# EAGLE board FieldsMJPanel (EAGLE 9.6.2)
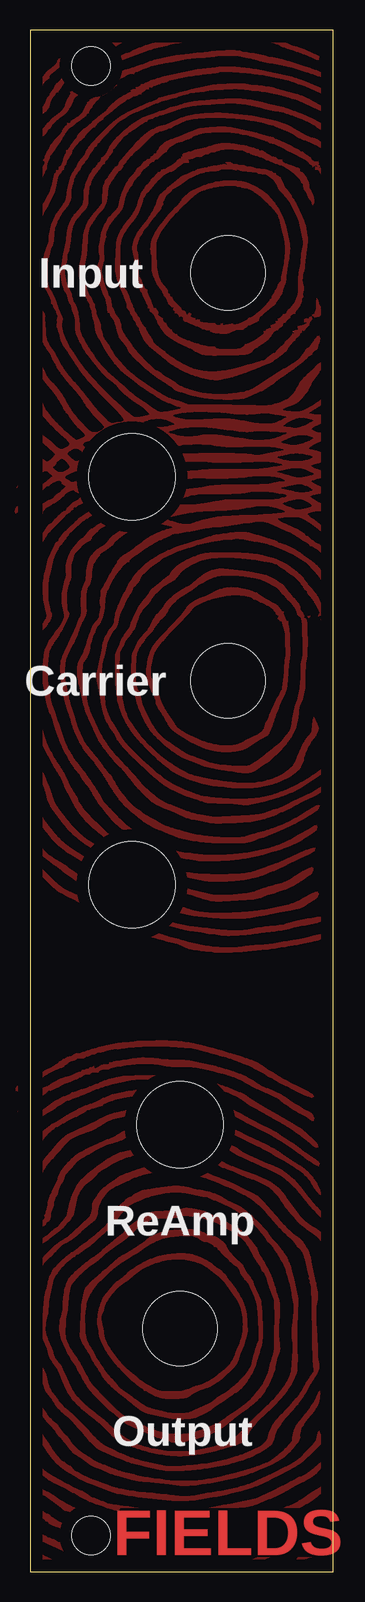
[diagram p0: board, top side]
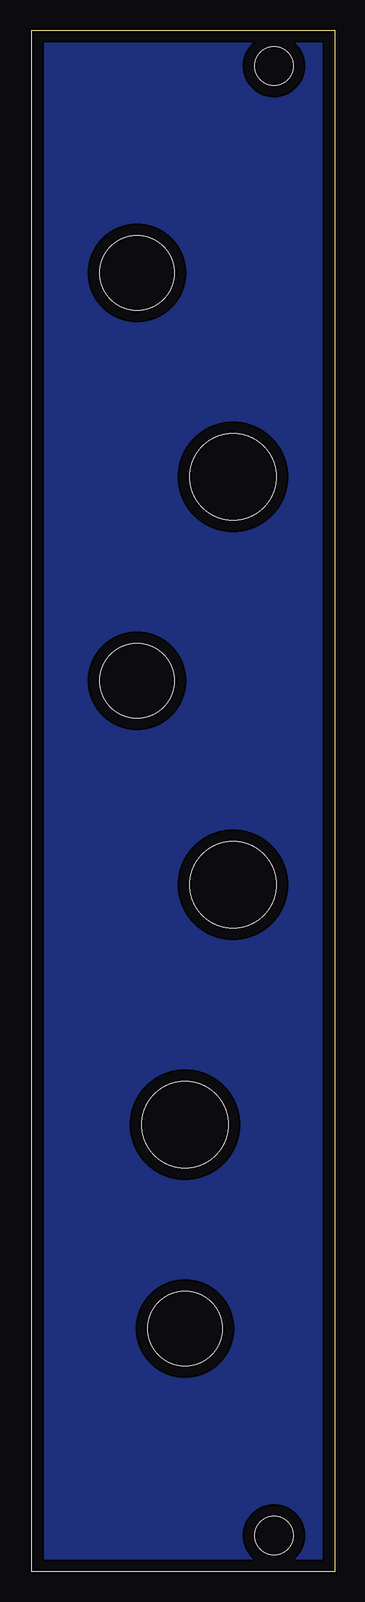
[diagram p1: board, bottom side, seen from below]

Size 25.25 x 128.5 mm. Coordinates in mm from the lower left corner, seen from the top.
Outline: 0,0 25.25,0 25.25,128.5 0,128.5 0,0
Copper layers (1*16): Top 0.035mm / dielectric 1.5mm / Bottom 0.035mm
Design rules "default": minimum track width 6mil, minimum drill 0.35mm, track to track 6mil, track to pad 6mil, pad to pad 6mil, via to via 6mil, smd to smd 6mil, copper to edge 40mil, drill to drill 6mil, minimum pad ring 10mil, minimum via ring 8mil, stop-mask expansion 4mil, vias tented up to drill 0mil, thermal gap 10mil
Holes 3.2 mm at 5.08,3 5.08,125.5
Holes 6.2 mm at 16.5,108.25 16.5,74.25 12.5,20.25

## Footprints (pad centres in the part's own frame; a part is rotated, then mirrored left to right if it is on the bottom)
ALPHA9MM_POT_CUTOUT = hole 7.2: 0,0

## Placement (x,y rotation side)
E$4  [ALPHA9MM_POT_CUTOUT]  8.5,91.25 0 top
E$5  [ALPHA9MM_POT_CUTOUT]  8.5,57.25 0 top
E$6  [ALPHA9MM_POT_CUTOUT]  12.5,37.25 0 top

## Library data of the parts
E$4-E$6 = ElectricNoodleBox

## Tracks (layer width: path | path; a pad name or v marks a point on that pad's centre or on a via)
AGND
  pour Bottom: 0,-0.25 25.5,-0.25 25.5,128.75 0,128.75
GND
  pour Top (rank 3): 1.94,0.46 2.12,0.37 2.31,0.32 2.51,0.3 2.69,0.36 2.6,0.51 2.43,0.62 2.26,0.71 2.08,0.81 1.91,0.92 1.73,1.01 1.38,1.19 1.2,1.28 1.03,1.38 0.85,1.49 0.69,1.6 0.55,1.5 0.51,1.31 0.64,1.16 0.82,1.06 0.99,0.96 1.17,0.88 1.35,0.79 1.53,0.69 1.7,0.59 1.87,0.49
  pour Top (rank 3): 5.63,0.67 5.83,0.68 6.03,0.71 6.22,0.75 6.41,0.8 6.6,0.88 6.43,0.96 6.24,1 6.04,1.03 5.84,1.07 5.65,1.11 5.46,1.16 5.26,1.21 5.07,1.27 4.88,1.33 4.69,1.39 4.5,1.46 4.31,1.52 4.12,1.6 3.94,1.68 3.59,1.87 3.41,1.96 3.24,2.05 3.06,2.14 2.87,2.22 2.69,2.3 2.51,2.38 2.32,2.44 2.17,2.56 2,2.64 1.81,2.71 1.63,2.78 1.43,2.82 1.31,2.96 1.12,3.01 0.93,3.1 0.8,3.21 0.61,3.16 0.48,3.02 0.57,2.84 0.73,2.72 0.9,2.62 1.08,2.53 1.26,2.45 1.44,2.36 1.99,2.12 2.17,2.03 2.35,1.95 2.53,1.86 2.71,1.77 2.88,1.67 3.06,1.57 3.24,1.48 3.42,1.41 3.61,1.34 3.79,1.25 3.96,1.15 4.14,1.13 4.34,1.07 4.53,1.01 5.1,0.82 5.29,0.77 5.48,0.71
  pour Top (rank 3): 18.34,0.77 18.54,0.78 18.74,0.81 18.94,0.85 19.13,0.89 19.32,0.95 19.51,1.02 19.7,1.09 19.88,1.18 20.06,1.25 20.25,1.33 20.44,1.4 20.82,1.52 21,1.59 21.19,1.66 21.37,1.75 21.55,1.83 21.74,1.91 21.92,1.98 22.29,2.13 22.86,2.34 23.23,2.49 23.6,2.63 23.78,2.71 23.97,2.78 24.16,2.85 24.35,2.92 24.5,3.05 24.55,3.24 24.45,3.36 24.27,3.29 23.9,3.12 23.54,2.96 22.98,2.73 22.43,2.5 21.87,2.28 21.31,2.06 20.75,1.85 20.37,1.71 20,1.59 19.81,1.52 19.62,1.44 19.44,1.35 19.29,1.3 19.1,1.23 18.74,1.06 18.55,0.99 18.36,0.94
  pour Top (rank 3): 22.31,0.98 22.51,0.95 22.71,0.98 22.89,1.04 23.08,1.12 23.27,1.18 23.46,1.23 23.65,1.29 24.03,1.41 24.22,1.48 24.4,1.58 24.47,1.76 24.41,1.94 24.22,1.9 23.86,1.73 23.67,1.66 23.48,1.59 23.29,1.55 23.09,1.5 22.9,1.43 22.72,1.36 22.53,1.28 22.36,1.18 22.24,1.03
  pour Top (rank 3): 201 corners
  pour Top (rank 3): 205 corners
  pour Top (rank 3): 205 corners
  pour Top (rank 3): 11.43,5.98 11.63,5.96 11.83,5.95 12.03,5.95 12.43,5.94 12.83,5.94 13.03,5.95 13.23,5.95 13.43,5.96 13.63,5.97 13.82,5.98 14.02,6.01 15.21,6.21 15.6,6.29 15.79,6.33 16.19,6.41 16.38,6.45 16.77,6.54 16.96,6.59 17.35,6.69 17.55,6.74 17.93,6.85 18.12,6.91 18.5,7.03 18.69,7.09 18.88,7.16 19.07,7.23 19.26,7.3 19.44,7.38 19.62,7.47 19.79,7.57 20.15,7.75 20.68,8.03 21.57,8.49 21.92,8.68 22.1,8.77 22.27,8.88 22.44,8.98 22.6,9.09 22.76,9.22 22.91,9.35 23.48,9.91 24.05,10.47 24.2,10.61 24.33,10.76 24.36,10.94 24.31,11.13 24.25,11.32 24.19,11.51 24.09,11.69 23.96,11.58 23.92,11.38 23.89,11.19 23.84,10.99 23.75,10.81 23.64,10.65 23.52,10.49 23.38,10.34 23.25,10.2 23.11,10.05 22.83,9.76 22.69,9.62 22.55,9.48 22.4,9.35 22.24,9.23 22.07,9.12 21.9,9.01 21.73,8.92 21.55,8.82 21.19,8.64 20.3,8.19 19.76,7.93 19.4,7.76 19.03,7.59 18.85,7.51 18.67,7.43 18.48,7.36 18.29,7.29 18.1,7.23 17.91,7.16 17.72,7.11 17.53,7.05 17.34,7 16.95,6.9 16.76,6.85 16.37,6.76 16.17,6.71 15.97,6.68 15.58,6.63 15.18,6.57 14.79,6.51 14.59,6.48 14.39,6.45 14.2,6.41 14,6.37 13.81,6.32 13.61,6.29 13.41,6.26 13.21,6.25 13.01,6.24 12.81,6.24 12.61,6.24 12.41,6.26 12.21,6.27 12.01,6.3 11.82,6.32 11.42,6.38 11.22,6.41 10.82,6.46 10.43,6.5 10.23,6.51 9.83,6.54 9.63,6.56 9.43,6.58 9.03,6.62 8.64,6.67 8.24,6.73 7.85,6.8 7.65,6.83 7.45,6.87 7.26,6.92 7.07,6.97 6.88,7.04 6.69,7.1 6.5,7.17 6.12,7.3 5.56,7.52 5.19,7.66 4.82,7.82 4.63,7.89 4.45,7.98 4.28,8.07 4.1,8.17 3.92,8.26 3.75,8.35 3.61,8.5 3.5,8.66 3.34,8.78 3.15,8.85 2.99,8.97 2.84,9.1 2.66,9.17 2.52,9.31 2.4,9.47 2.27,9.62 2.01,9.93 1.89,10.09 1.81,10.27 1.7,10.44 1.59,10.61 1.48,10.77 1.25,11.1 1.01,11.42 0.77,11.73 0.64,11.89 0.52,12.05 0.38,12.2 0.25,12.19 0.25,11.99 0.32,11.8 0.41,11.62 0.51,11.45 0.61,11.28 0.72,11.11 1.48,9.94 1.59,9.77 1.71,9.61 1.84,9.45 1.97,9.3 2.1,9.15 2.24,9.01 2.39,8.88 2.54,8.75 2.7,8.63 2.87,8.51 3.04,8.41 3.89,7.88 4.06,7.78 4.24,7.69 4.42,7.61 4.6,7.53 4.79,7.45 5.16,7.3 6.65,6.73 6.84,6.66 7.03,6.6 7.22,6.54 7.42,6.5 7.62,6.47 8.21,6.37 8.6,6.31 9,6.25 9.2,6.22 9.39,6.2 9.79,6.15 10.59,6.07 11.38,5.98
  pour Top (rank 3): 263 corners
  pour Top (rank 3): 640 corners
  pour Top (rank 3): 580 corners
  pour Top (rank 3): 506 corners
  pour Top (rank 3): 423 corners
  pour Top (rank 3): 356 corners
  pour Top (rank 3): 289 corners
  pour Top (rank 3): 278 corners
  pour Top (rank 3): 245 corners
  pour Top (rank 3): 229 corners
  pour Top (rank 3): 215 corners
  pour Top (rank 3): 243 corners
  pour Top (rank 3): 208 corners
  pour Top (rank 3): 205 corners
  pour Top (rank 3): 206 corners
  pour Top (rank 3): 218 corners
  pour Top (rank 3): 216 corners
  pour Top (rank 3): 266 corners
  pour Top (rank 3): 4790 corners
  pour Top (rank 3): 447 corners
  pour Top (rank 3): 450 corners
  pour Top (rank 3): 429 corners
  pour Top (rank 3): 366 corners
  pour Top (rank 3): -0.22,75.27 -0.2,75.46 -0.25,75.39
  pour Top (rank 3): 24.37,79.04 24.52,79.17 24.57,79.35 24.39,79.41 24.24,79.37 24.42,79.28 24.31,79.16
  pour Top (rank 3): 23.23,79.51 23.34,79.63 23.16,79.62
  pour Top (rank 3): 24.33,79.51 24.53,79.5 24.72,79.55 24.67,79.66 24.47,79.63
  pour Top (rank 3): 477 corners
  pour Top (rank 3): 472 corners
  pour Top (rank 3): 464 corners
  pour Top (rank 3): 349 corners
  pour Top (rank 3): 15.88,103.96 16.06,103.91 16.06,104.03 15.88,103.98
  pour Top (rank 3): 13.34,104.68 13.43,104.79 13.25,104.89 13.16,104.77
  pour Top (rank 3): 23.74,104.56 23.9,104.6 24.09,104.66 24.22,104.79 24.41,104.74 24.44,104.78 24.29,104.92 24.16,105.07 24.24,105.08 24.34,105.06 24.23,105.22 24.15,105.36 24.24,105.4 24.12,105.56 24.05,105.75 24.02,105.94 23.91,106.11 23.86,105.92 23.86,105.72 23.87,105.32 23.8,105.15 23.74,104.96 23.75,104.76 23.61,104.78 23.54,104.74
  pour Top (rank 3): -0.24,109.01 -0.2,108.99 -0.2,109.19 -0.24,109.16
  pour Top (rank 3): 297 corners
  pour Top (rank 3): 269 corners
  pour Top (rank 3): 24.32,116.25 24.48,116.28 24.6,116.44 24.66,116.63 24.59,116.82 24.48,116.93 24.28,116.95 24.08,116.98 23.9,117.05 23.76,117.09 23.77,116.9 23.97,116.89 24.05,116.8 24.14,116.63 24.27,116.48 24.34,116.3
  pour Top (rank 3): 24.62,117.14 24.77,117.17 24.64,117.3
  pour Top (rank 3): 234 corners
  pour Top (rank 3): 0.67,121.4 0.85,121.44 1.03,121.53 1.19,121.65 1.34,121.79 1.47,121.93 1.59,122.1 1.64,122.29 1.69,122.48 1.77,122.66 1.86,122.84 1.97,123.01 2.12,123.13 2.21,123.31 2.36,123.37 2.44,123.52 2.55,123.69 2.79,124.01 2.9,124.18 3,124.34 3.17,124.43 3.19,124.62 3.35,124.73 3.5,124.85 3.65,124.99 3.79,125.13 3.94,125.26 4.1,125.38 4.27,125.48 4.43,125.59 4.58,125.72 4.76,125.81 4.92,125.92 5.08,126.02 5.27,126.07 5.43,126.19 5.6,126.28 5.78,126.35 5.96,126.44 6.13,126.55 6.25,126.68 6.45,126.71 6.57,126.85 6.75,126.92 6.92,127.02 7.09,127.13 7.43,127.35 7.6,127.45 7.77,127.56 7.95,127.65 8.13,127.74 8.32,127.81 8.5,127.88 8.68,127.97 8.85,128 9.03,128.08 9.21,128.18 9.39,128.25 9.58,128.31 9.77,128.37 9.97,128.42 10.16,128.47 10.35,128.52 10.45,128.62 10.27,128.7 10.08,128.76 9.88,128.78 9.68,128.76 9.48,128.72 9.29,128.66 9.1,128.59 8.92,128.51 8.73,128.43 8.55,128.35 8.19,128.19 7.83,128.02 7.47,127.84 7.29,127.75 6.76,127.47 6.59,127.36 6.5,127.21 6.31,127.16 6.14,127.06 5.98,126.93 5.8,126.86 5.71,126.73 5.51,126.68 5.31,126.67 5.33,126.64 5.52,126.61 5.62,126.49 5.44,126.47 5.36,126.43 5.27,126.44 5.15,126.29 4.97,126.21 4.77,126.23 4.67,126.11 4.51,126.02 4.35,125.92 4.21,125.8 4.02,125.74 3.86,125.62 3.72,125.48 3.58,125.33 3.44,125.2 3.26,125.11 3.13,124.96 3.04,124.79 2.87,124.69 2.72,124.56 2.61,124.39 2.49,124.23 2.35,124.09 2.19,123.97 2.05,123.82 1.99,123.64 1.88,123.47 1.76,123.32 1.65,123.15 1.59,122.99 1.47,122.84 1.37,122.66 1.21,122.3 1.11,122.12 1,121.96 0.86,121.82 0.73,121.67
  pour Top (rank 3): 0.67,123.71 0.79,123.63 0.93,123.78 1.04,123.94 1.15,124.11 1.28,124.26 1.42,124.41 1.6,124.5 1.61,124.69 1.73,124.85 1.88,124.98 2.04,125.1 2.2,125.22 2.36,125.34 2.51,125.47 2.65,125.61 2.76,125.78 2.9,125.9 2.89,126.09 3.04,126.21 3.23,126.26 3.32,126.42 3.51,126.46 3.61,126.61 3.78,126.7 3.79,126.78 3.89,126.91 3.98,127.07 4.14,127.19 4.31,127.29 4.47,127.4 4.64,127.51 4.82,127.61 5.34,127.9 5.69,128.1 5.86,128.21 6.03,128.31 6.53,128.64 6.41,128.67 6.21,128.69 6.01,128.68 5.82,128.63 5.64,128.55 5.46,128.45 5.29,128.35 4.95,128.15 4.78,128.04 4.61,127.93 4.45,127.81 4.28,127.7 4.1,127.61 3.92,127.53 3.75,127.43 3.65,127.28 3.46,127.22 3.28,127.12 3.2,126.95 3.12,126.81 3.02,126.69 2.92,126.54 2.76,126.44 2.71,126.28 2.58,126.15 2.4,126.07 2.28,125.91 2.22,125.72 2.12,125.56 1.8,125.32 1.64,125.19 1.49,125.06 1.35,124.92 1.23,124.77 1.11,124.6 0.85,124.3 0.74,124.13 0.67,123.95
  pour Top (rank 3): 23.33,127.75 23.52,127.7 23.71,127.66 23.91,127.66 24,127.82 23.9,127.98 23.72,128.06 23.53,128.13 23.34,128.19 23.15,128.24 22.95,128.29 22.76,128.33 22.56,128.37 22.36,128.4 22.16,128.42 21.97,128.44 21.82,128.39 21.96,128.25 22.13,128.15 22.32,128.08 22.5,128.01 22.89,127.89 23.27,127.77

## Text on the board
Top: FIELDS
tPlace: Input | Carrier | ReAmp | Output
tStop: FIELDS